# Altium PCB power_manage.PcbDoc
Units mm, origin at the board's own origin, x right, y up, seen from the top; angles counter-clockwise.
Board outline 49.91 x 50.55 mm, 2 copper layers (Top Layer, Bottom Layer); 12 components, 5 nets, 78 pads, 0 vias.
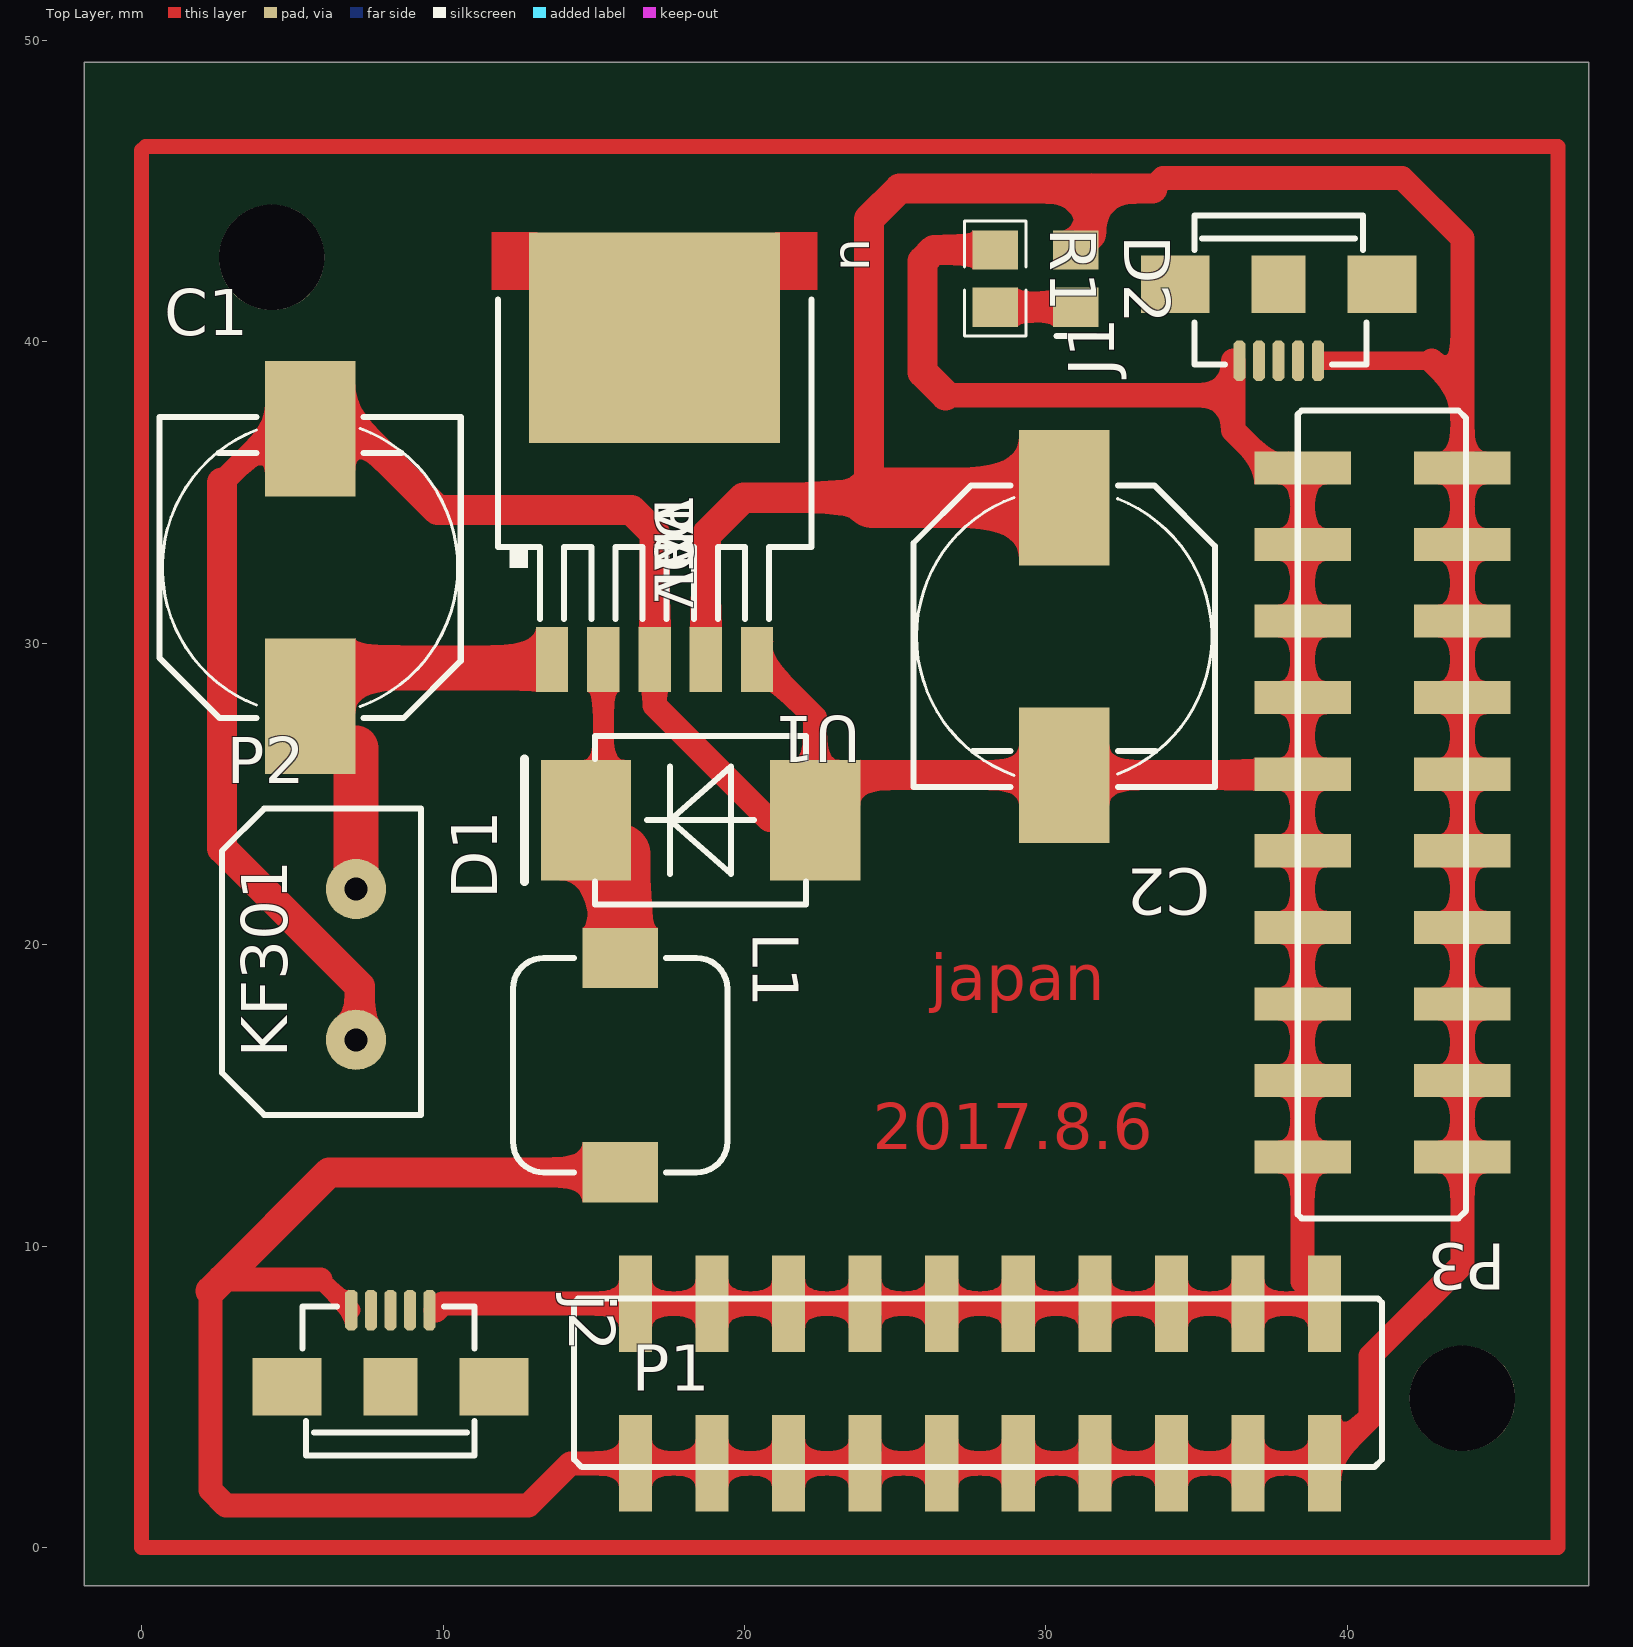
[diagram p0: Top Layer view]
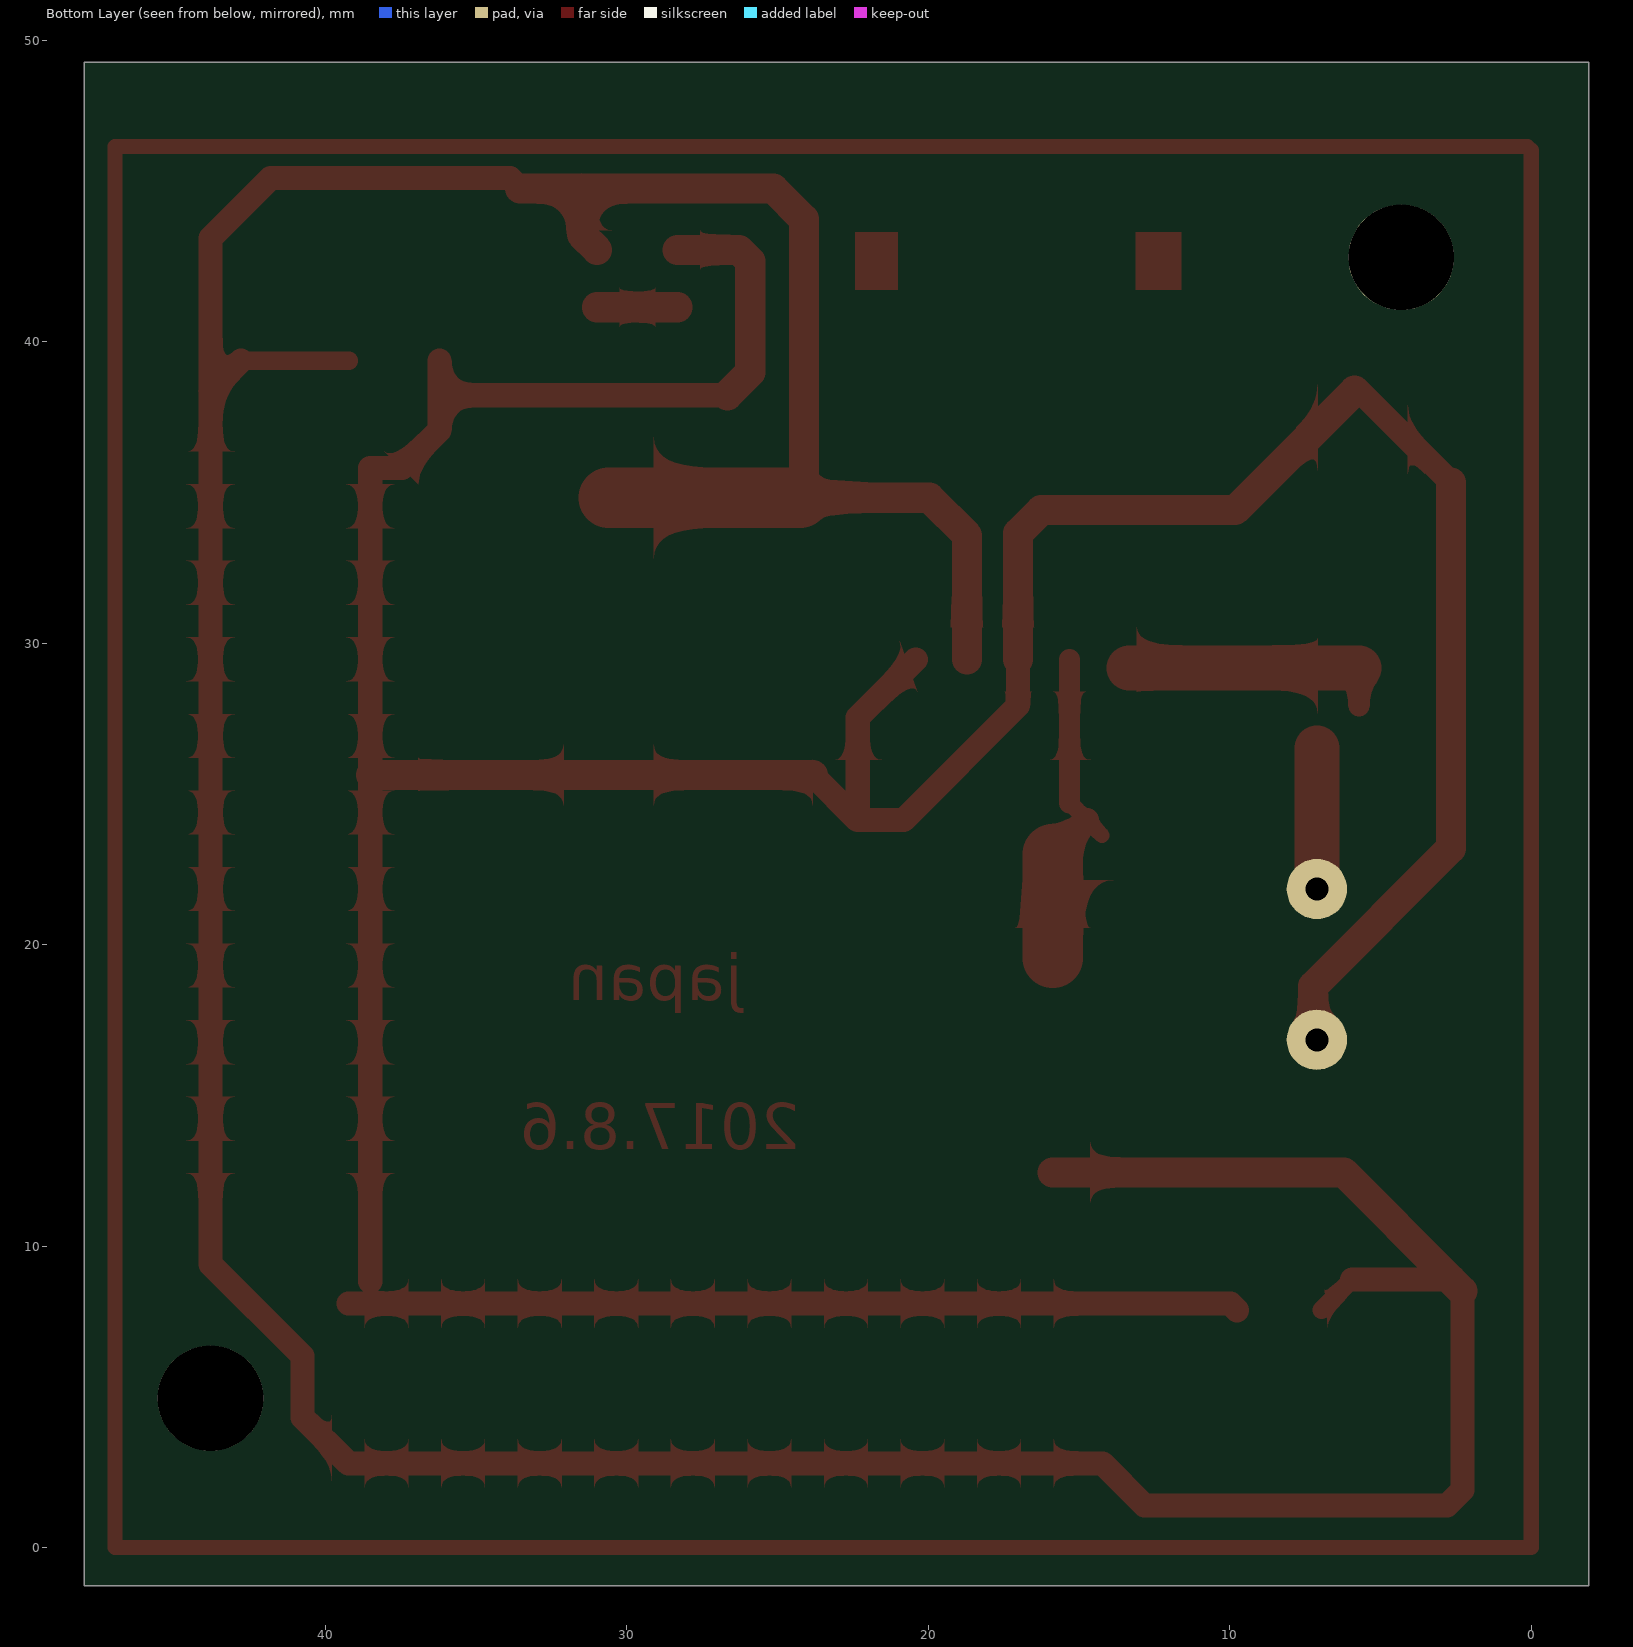
[diagram p1: Bottom Layer view, seen from below]

## Layer stack, top to bottom
Top Solder: solder mask 0.0102, Solder Resist, Dk 3.5
Top Layer: signal copper 0.0356
Dielectric1: dielectric 0.32, FR-4, Dk 4.8
Bottom Layer: signal copper 0.0356
Bottom Solder: solder mask 0.0102, Solder Resist, Dk 3.5

## Board outline
-1.905,-1.27 48.006,-1.27 48.006,49.276 -1.905,49.276

## Design rules (kind name [scope] priority, off if disabled: settings)
Clearance [All] p1: gap=0.4 ignorepadtopadclearanceinfootprint=FALSE except(0: Arc-Hole Track-Hole SMDPad-Hole THPad-Hole Via-Hole Fill-Hole Poly-Hole Region-Hole Text-Hole)
PolygonConnect [All] p1: connectstyle=Relief reliefconductorwidth=0.254 reliefentries=4 polygonreliefangle="90 Angle" airgapwidth=0.254
RoutingVias [All] p1: holewidth=0.711 width=1.27 viastyle="Through Hole" minholewidth=0.711 minwidth=1.27 maxholewidth=0.711 maxwidth=1.27
SilkToSolderMaskClearance SilkscreenOverComponentPads [IsPad] p1: minsilkscreentomaskgap=0.254 clearancetoexposedcopper=TRUE
SolderMaskExpansion [All] p1: expansion=0.102
Width [All] p1: maxlimit=2 minlimit=0.7 preferedwidth=1
29 further rules are at their usual default settings.

## Components (designator, comment, footprint, x,y, rotation, side; value= is the part's Value field where it differs from the comment)
C1 "Cap Pol" C-RB-S10 5.588,32.512 r90 top value=100uF
C2 "Cap Pol" C-RB-S10 30.607,30.226 r270 top value=100uF
D1 "D-Schottky" DIODE-SMC 18.542,24.13 r180 top
D2 "Bulle" LED_0805 30.988,42.098 r270 top
J1 "USB_M" USB_MICRO 37.719,41.91 r180 top
j2 "USB_M" USB_MICRO 8.255,5.334 r0 top
L1 "Inductor" L-SMD-7 15.875,16.002 r270 top value=33uH
P1 "Header 10X2" Head_SOP20 16.383,2.794 r90 top
P2 "Header 2" KF301_2 7.112,21.844 r0 top
P3 "Header 10X2" Head_SOP20 43.815,12.954 r180 top
R1 "Res1" 0805-1 28.321,42.098 r270 top value=1K
U1 "LM2596SX_ADJ_NOP" KTT0005B 17.018,34.798 r270 top value=Value

## Footprints (in the part's own frame and the unit in brackets; to place one, negate y for a bottom-side part, rotate by r counter-clockwise, add the part's x,y. Pads: shape width x height; smd on the part's side, far side on the other; paste and mask are expansions set on the pad)
0805-1 [mm] "贴片带丝印"
  rect 1.3x1.5 smd: 1(-0.95,0) 2(0.95,0)
  silkscreen extent -1.91,-1.02 1.91,1.02, body extent -1.14,-0.51 1.14,0.51, height 1
C-RB-S10 [mm] "贴片电解"
  rect 4.5x3 smd: 1(-4.6,0) 2(4.6,0)
  silkscreen extent -5,-5 5,5
DIODE-SMC [mm] "贴片二极管"
  rect 3x4 smd: 1(-3.8,0) 2(3.8,0)
  silkscreen extent -3.5,-2.79 5.84,2.79, body extent -3.81,-2.79 3.94,2.79, height 1.05
Head_SOP20 [mm]
  rect 3.2x1.1 smd: 1(0,0) 2(5.3,0) 3(0,-2.54) 4(5.3,-2.54) 5(0,-5.08) 6(5.3,-5.08) 7(0,-7.62) 8(5.3,-7.62) 9(0,-10.16) 10(5.3,-10.16) 11(0,-12.7) 12(5.3,-12.7) 13(0,-15.24) 14(5.3,-15.24) 15(0,-17.78) 16(5.3,-17.78) 17(0,-20.32) 18(5.3,-20.32) 19(0,-22.86) 20(5.3,-22.86)
  silkscreen extent -0.13,-24.77 5.46,2.03
KF301_2 [mm]
  round 2 hole 0.762: 1(0,-5) 2(0,0)
  silkscreen extent -4.44,-7.49 2.16,2.67
KTT0005B [mm]
  rect 2.16x1.07 smd paste-0.102 mask+0.051: 1(5.338,-3.4) 2(5.338,-1.7) 3(5.338,0.005) 4(5.338,1.7) 5(5.338,3.4)
  rect 6.99x8.33 smd paste-0.102 mask+0.051: 6(-5.338,0)
  Top Layer region: -8.832,-3.9 -8.832,-5.4 -6.923,-5.4 -6.923,-3.9
  Top Layer region: -8.832,5.4 -8.832,4 -6.923,4 -6.923,5.4
  silkscreen extent -6.6,-5.2 4,5.2, body extent 0,0 0.25,0.25, height 0.25
L-SMD-7 [mm] "贴片电感7*7"
  rect 2x2.5 smd: 1(-3.556,0) 2(3.556,0)
  silkscreen extent -3.56,-3.56 3.56,3.56, body extent -3.56,-3.56 3.56,3.56, height 4
LED_0805 [mm] "贴片二极管"
  rect 1.3x1.5 smd: 1(-0.95,0) 2(0.95,0)
  silkscreen extent 1.91,-0.63 1.91,0.64
USB_MICRO [mm] "USB方孔"
  oct 0.4x1.35 smd: 1(-1.3,2.54) 2(-0.65,2.54) 3(0,2.54) 4(0.65,2.54) 5(1.3,2.54)
  rect 2.286x1.9 smd: 6(3.429,0) 7(-3.429,0)
  rect 1.8x1.9 smd: 8(0,0)
  silkscreen extent -2.92,-2.29 2.79,2.67

## Part data
C1 C2: "极性电解电容", LatestRevisionDate=17-Jul-2002, LatestRevisionNote="Re-released for DXP Platform.", PackageReference=RB7.6-15, Published=8-Jun-2000, Publisher="Altium Limited"
  C1: Vol=35V
  C2: Vol=16V
D1: "肖特基二极管", Code_JEDEC=DO-214-AA, LatestRevisionDate=17-Jul-2002, LatestRevisionNote="Re-released for DXP Platform.", PackageReference=SMB, Published=8-Jun-2000, Publisher="Altium Limited", Type=SS14
D2: library part LED0, "发光二极管", LatestRevisionDate=08-Jul-2005, LatestRevisionNote="Mech Layer 1 removed.", PackageReference=LED-0, Published=8-Jun-2000, Publisher="Altium Limited"
J1 j2: "MicroUSB接口"
L1: "电感", Code_IEC=1005, Code_JEITA=0402, LatestRevisionDate=17-Jul-2002, LatestRevisionNote="Re-released for DXP Platform.", PackageReference=0402-A, Published=8-Jun-2000, Publisher="Altium Limited"
P1: "Header, 10-Pin", LatestRevisionDate=17-Jul-2002, LatestRevisionNote="Re-released for DXP Platform.", Publisher="Altium Limited"
P2: "Header, 2-Pin", LatestRevisionDate=17-Jul-2002, LatestRevisionNote="Re-released for DXP Platform.", Publisher="Altium Limited"
P3: "Header, 10-Pin, Dual row", LatestRevisionDate=17-Jul-2002, LatestRevisionNote="Re-released for DXP Platform.", Publisher="Altium Limited"
R1: "贴片电阻", LatestRevisionDate=17-Jul-2002, LatestRevisionNote="Re-released for DXP Platform.", PackageReference=AXIAL-0.4, Published=8-Jun-2000, Publisher="Altium Limited"
U1: "Imported", Alternate_PartNumber=LM2596S-ADJ/NOPB, Manufacturer="Texas Instruments", PartNumber=LM2596SX-ADJ/NOPB, CompType=IC, MountType=SMT, PackageReference=KTT0005B, PIN_COUNT=6, RefDes=RefDes, RoHS=Y, Type=TYPE

## Free pads (board coordinates)
  round 3.5 hole 3.5 unplated: 1(43.815,4.953) 2(4.318,42.799)

## Nets (pads, with @x,y where several pads share a name; then routed paths per layer and width w, separated by ;. In a path a pad name is that pad's centre, name@x,y a point inside that pad or via, vN(x,y) a via of type N, cw(c..) or ccw(c..) an arc to the next point about the centre after c; other vN are vias at no path point)
+5V: C2.1 D2.1 J1.1 j2.1 L1.2 P1.1 P1.3 P1.5 P1.7 P1.9 P1.11 P1.13 P1.15 P1.17 P1.19 P3.1 P3.3 P3.5 P3.7 P3.9 P3.11 P3.13 P3.15 P3.17 P3.19 U1.4 | length 161
  Top Layer w0.6: 5.939,8.89 j2.1 ; 39.223,39.37 42.799,39.37
  Top Layer w0.8: 2.286,8.509 2.286,1.905 2.794,1.397 12.827,1.397 14.224,2.794 P1.1 P1.3 P1.5 P1.7 P1.9 P1.11 P1.13 P1.15 P1.17 P1.19 40.767,4.318 40.767,6.35 43.815,9.398 P3.1 P3.3 P3.5 P3.7 P3.9 P3.11 P3.13 P3.15 P3.17 P3.19 43.815,38.354 ; 2.667,8.89 5.939,8.89 ; 33.538,45.085 33.885,45.432 41.817,45.432 43.815,43.434 43.815,38.354 ; 42.799,39.37 43.815,38.354
  Top Layer w1: 2.286,8.509 2.667,8.89 6.223,12.446 L1.2 ; U1.4 18.718,33.577 19.967,34.826 24.257,34.826 24.13,34.953 24.13,44.069 25.146,45.085 31.496,45.085 ; D2.1 31.496,43.556 31.496,45.085 ; 33.538,45.085 31.496,45.085
  Top Layer w2: 24.257,34.826 C2.1
+12V: C1.1 P2.2 U1.1 | length 14
  Top Layer w0.7: C1.1@5.715,27.912 C1.1@5.715,29.182 ; U1.1@13.34,29.182 U1.1
  Top Layer w1.5: C1.1@5.715,29.182 U1.1@13.34,29.182 ; P2.2 7.112,26.515
GND: C1.2 C2.2 D1.1 J1.5 j2.5 P1.2 P1.4 P1.6 P1.8 P1.10 P1.12 P1.14 P1.16 P1.18 P1.20 P2.1 P3.2 P3.4 P3.6 P3.8 P3.10 P3.12 P3.14 P3.16 P3.18 P3.20 R1.1 U1.3 U1.5 | length 151.9
  Top Layer w0.8: 2.667,35.334 5.715,38.382 C1.2@5.861,38.382 ; 9.759,7.874 9.979,8.094 P1.2 P1.4 P1.6 P1.8 P1.10 P1.12 P1.14 P1.16 P1.18 P1.20 ; U1.3 17.023,27.935 20.828,24.13 D1.1 ; U1.5 22.342,27.537 D1.1 ; D1.1@23.838,25.626 D1.1 ; 26.67,38.227 36.215,38.227 ; 36.215,39.37 36.215,38.227 ; P3.12@38.487,25.626 P3.12 ; 38.515,8.822 P3.2 P3.4 P3.6 P3.8 P3.10 P3.12 ; 36.215,38.227 36.215,37.064 37.465,35.814 P3.20 P3.18 P3.16 P3.14 P3.12
  Top Layer w1: 2.667,35.334 2.667,23.194 7.239,18.622 P2.1@7.239,16.971 ; C1.2@5.861,38.382 9.826,34.417 16.256,34.417 17.023,33.65 U1.3 ; D1.1@23.838,25.626 C2.2 P3.12@38.487,25.626 ; 26.67,38.227 25.908,38.989 25.908,42.672 26.284,43.048 R1.1
NetD1_2: D1.2 L1.1 U1.2 | length 11.3
  Top Layer w0.5: D1.2@14.234,23.622 D1.2 D1.2@15.318,24.706
  Top Layer w0.7: D1.2@15.318,24.706 U1.2
  Top Layer w0.8: D1.2 D1.2@15.875,22.997
  Top Layer w2: L1.1 D1.2@15.875,22.997
NetD2_2: D2.2 R1.2 | length 2.7
  Top Layer w1: R1.2 D2.2
pads on no net: J1.2 J1.3 J1.4 J1.6 J1.7 J1.8 j2.2 j2.3 j2.4 j2.6 j2.7 j2.8 U1.6
copper on no net: | length 186.7
  Top Layer w0.5: 0,46.355 0,0 46.99,0 46.99,46.482 0.127,46.482

## Other copper
Top Layer:
  pour cut-out: 41.989,4.953 ccw(c43.74,4.953) 43.74,3.202 ccw(c43.74,4.953) 45.491,4.953 ccw(c43.74,4.953) 43.74,6.704 ccw(c43.74,4.953)
  pour cut-out: 4.318,41.049 cw(c4.318,42.799) 2.568,42.799 cw(c4.318,42.799) 4.318,44.549 cw(c4.318,42.799) 6.068,42.799 cw(c4.318,42.799)
  text "japan" at 26.162,18.161 h1.52
  text "2017.8.6" at 24.257,13.208 h1.52

## Text inside footprints (layer, text, board x,y; h text height)
P2: Top Overlay "KF301" at 4.826,16.256 h1.52 r90
U1: Top Overlay "DEV" at 17.018,34.798 h1.27 r270; Top Overlay "PN" at 17.018,34.798 h1.27 r270; Top Overlay "VAL" at 17.018,34.798 h1.27 r270; Top Overlay "TOL" at 17.018,34.798 h1.27 r270; Top Overlay "u" at 23.19,43.434 h1.27 r270